# Altium PCB BatteryCounterRX.PcbDoc
Units mm, origin at the board's own origin, x right, y up, seen from the top; angles counter-clockwise.
Board outline 63 x 76.9 mm, 2 copper layers (Top Layer, Bottom Layer); 91 components, 65 nets, 289 pads, 53 vias.
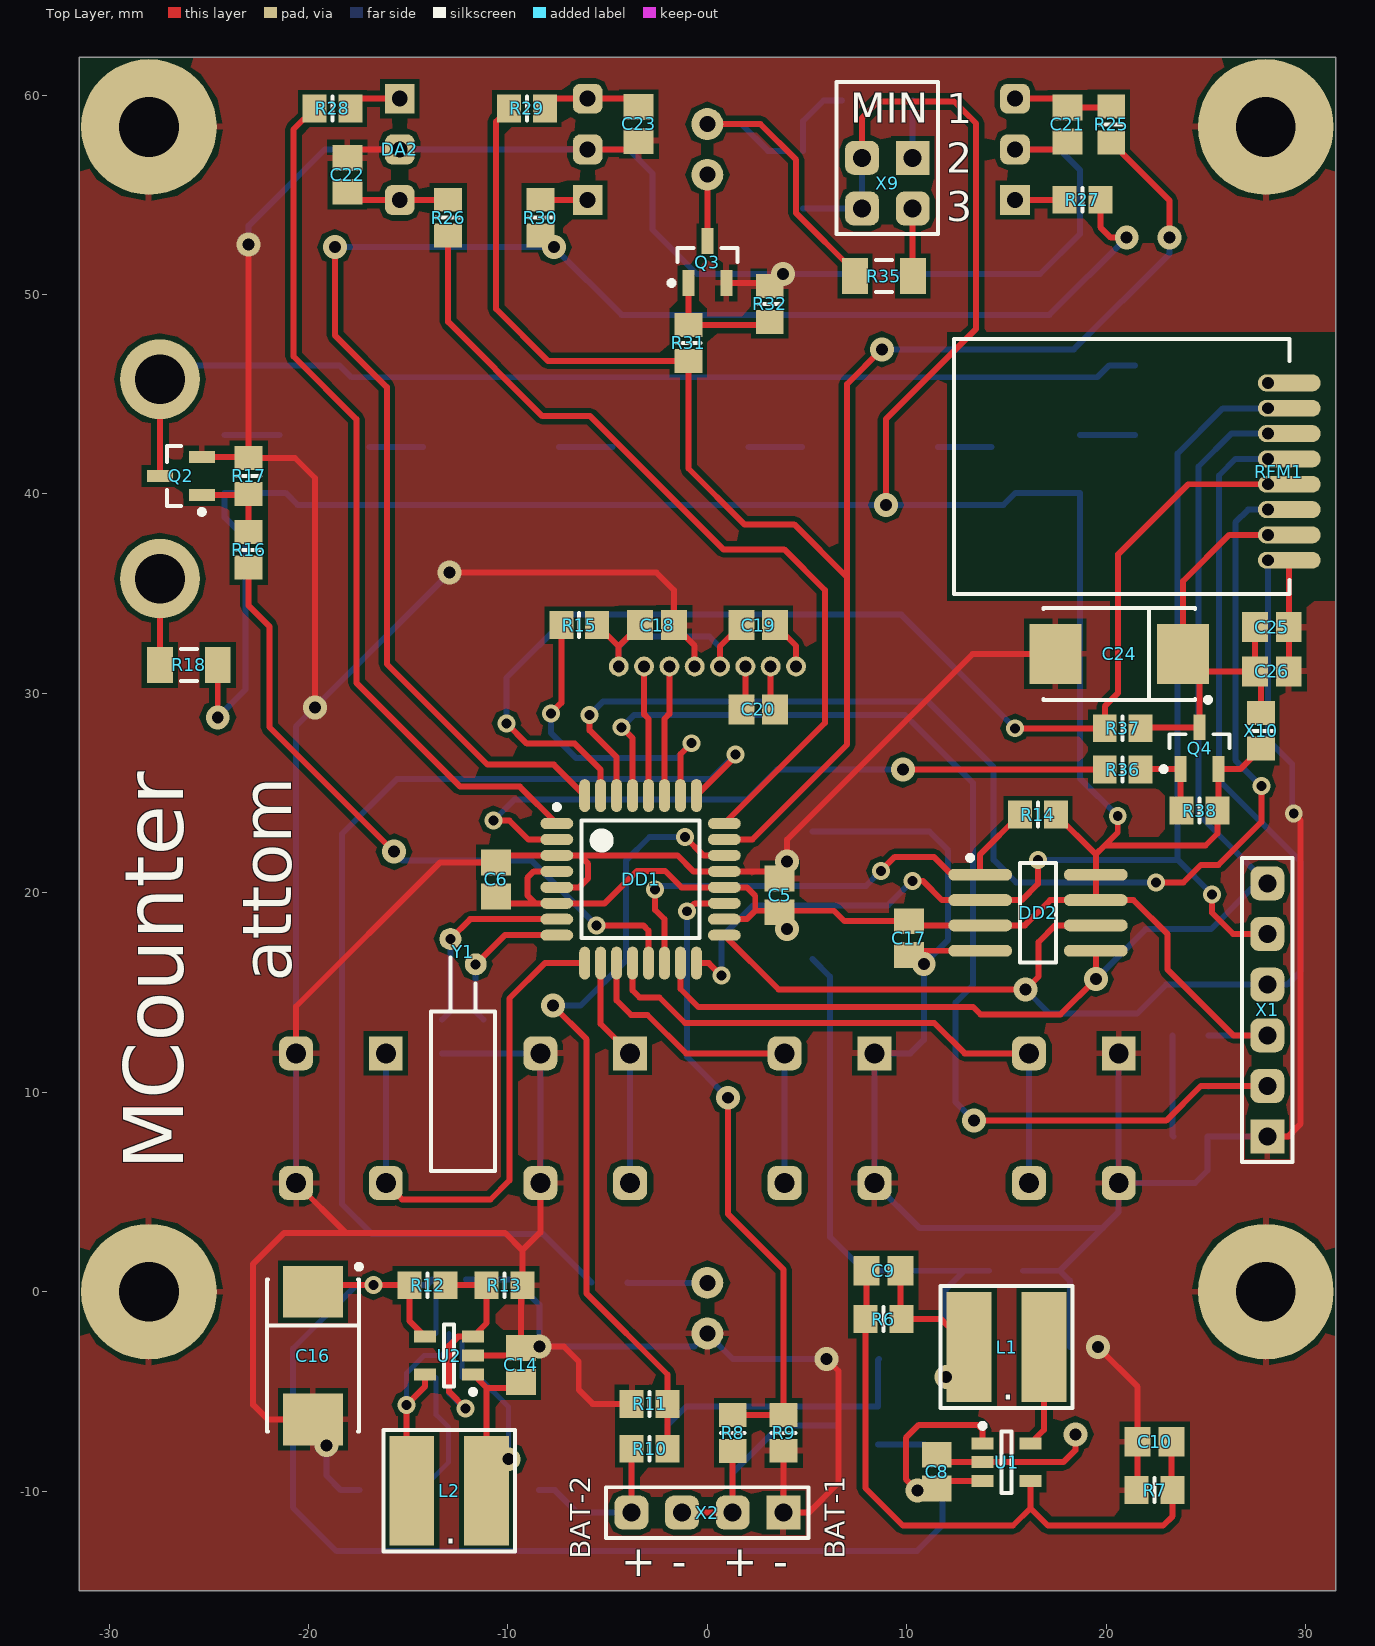
[diagram p0: Top Layer view]
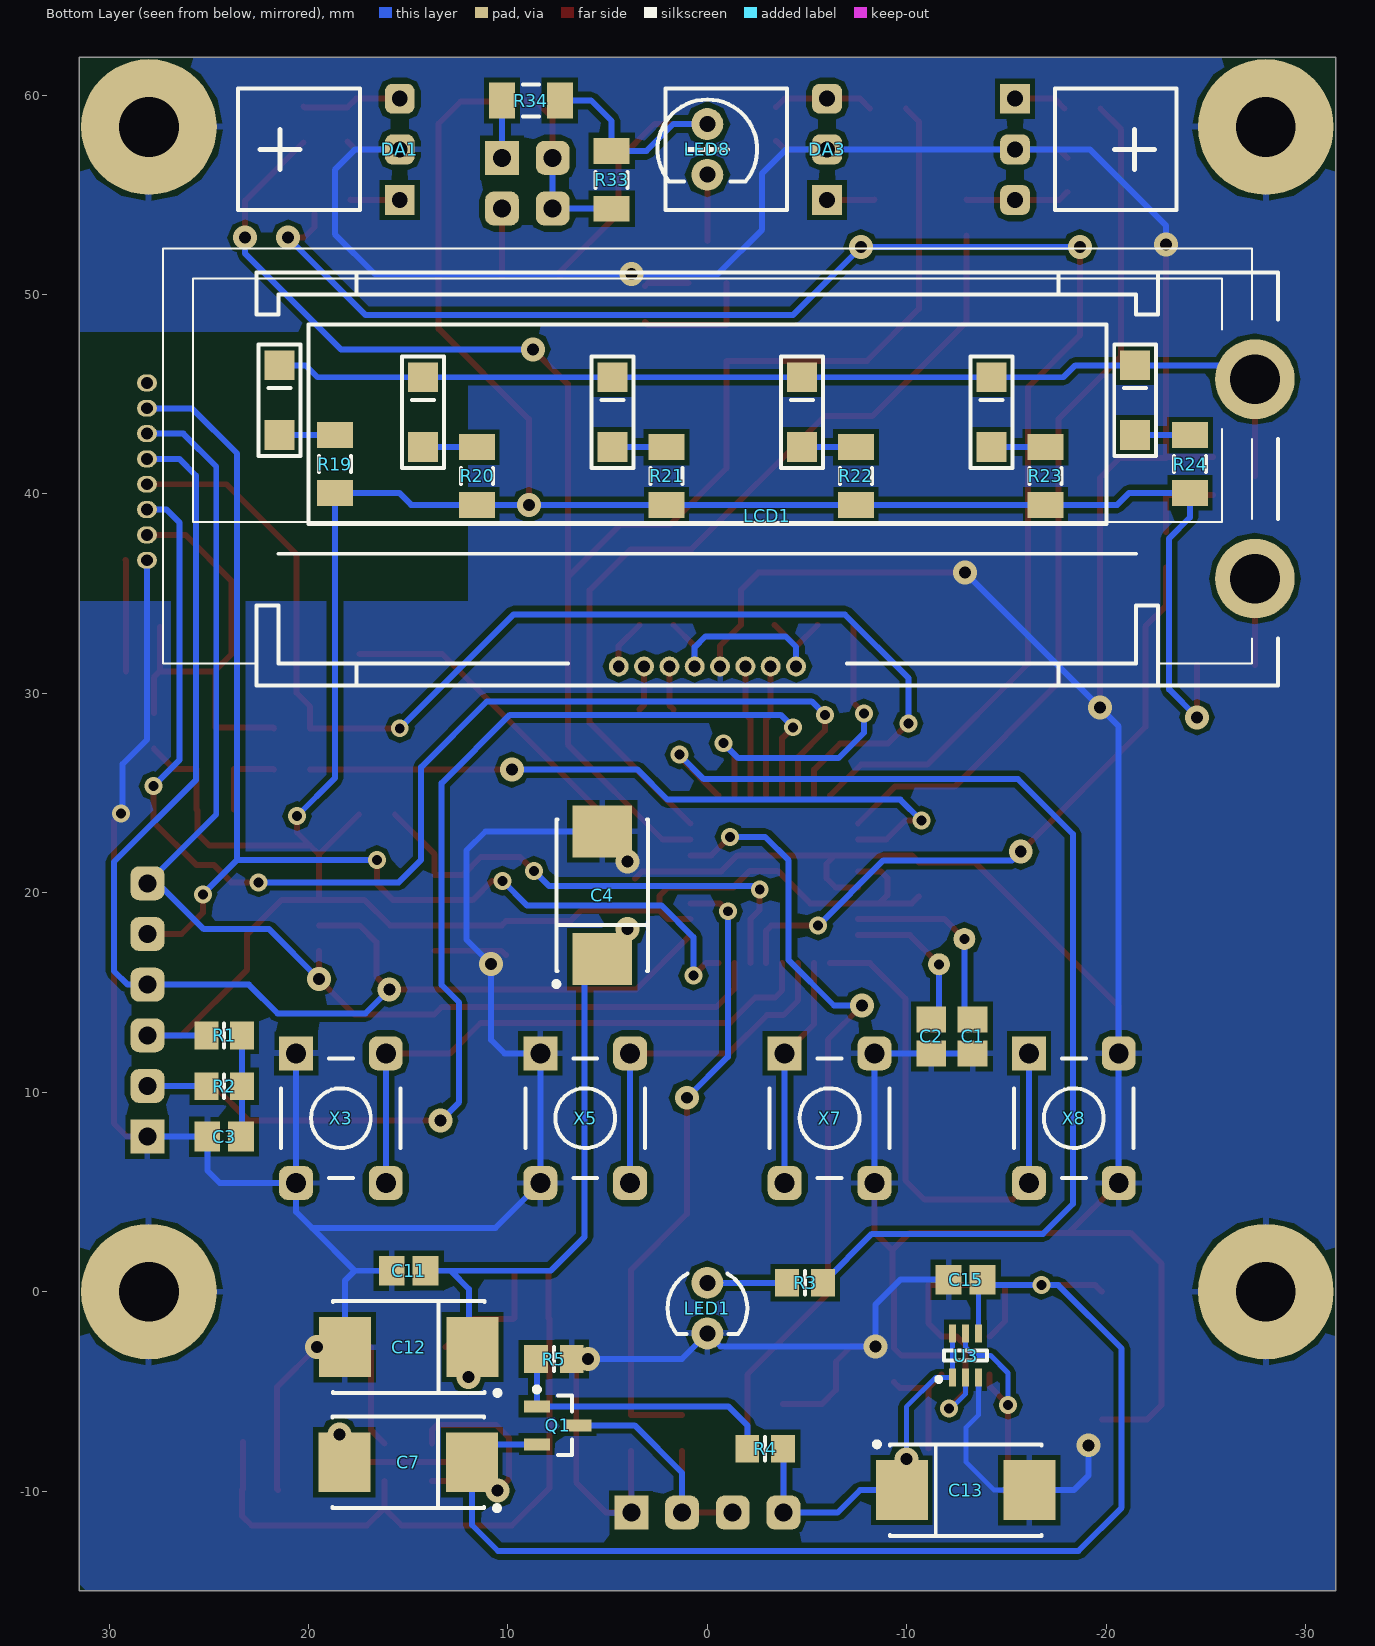
[diagram p1: Bottom Layer view, seen from below]

## Layer stack, top to bottom
Top Solder: solder mask 0.0102, Solder Resist, Dk 3.5
Top Layer: signal copper 0.0356
Dielectric 1: dielectric 0.32, FR-4, Dk 4.8
Bottom Layer: signal copper 0.0356
Bottom Solder: solder mask 0.0102, Solder Resist, Dk 3.5

## Board outline
-31.5,-15 -31.5,61.9 31.5,61.9 31.5,-15

## Design rules (kind name [scope] priority, off if disabled: settings)
Clearance [(OnLayer('Bottom Layer') OR OnLayer('Drill Drawing') OR OnLayer('Drill Guide') OR OnLayer('Multi-Layer') OR OnLayer('Top Layer')) vs (OnLayer('Bottom Layer') OR OnLayer('Drill Drawing') OR OnLayer('Drill Guide') OR OnLayer('Multi-Layer') OR OnLayer('Top Layer'))] p1: gap=0.25
ComponentClearance [All] p1: gap=0.25 collisioncheckmode=3 verticalgap=0.25 showdistances=FALSE
ComponentOrientations [All] p1: allowedrotations=27
DiffPairsRouting [All] p1: maxlimit=0.25 minlimit=0.25 mostfreqgap=0.25 toplayer_minwidth=0.381 toplayer_maxwidth=0.381 toplayer_prefwidth=0.381 bottomlayer_minwidth=0.381 bottomlayer_maxwidth=0.381 bottomlayer_prefwidth=0.381 maxuncoupledlength=12.5
Height [All] p1: minheight=0 maxheight=25 prefheight=12.5
HoleSize [All] p1: absolutevalues=TRUE maxlimit=3 minlimit=0.25 maxpercent=80.000 minpercent=20.000
HoleToHoleClearance [All] p1: gap=0.3 allowstackedmicrovias=TRUE
MinimumSolderMaskSliver [All] p1: minsoldermaskwidth=0.25
PlaneClearance [All] p1: clearance=0.5
PlaneConnect [All] p1: planeconnectstyle=Relief reliefexpansion=0.5 reliefentries=4 reliefconductorwidth=0.3 reliefairgap=0.3
PolygonConnect PolygonConnect_Via [All vs IsVia] p1: connectstyle=Direct reliefconductorwidth=0.254 reliefentries=4 polygonreliefangle="90 Angle" airgapwidth=0.254
PolygonConnect [All vs Not IsVia] p2: connectstyle=Relief reliefconductorwidth=0.3 reliefentries=4 polygonreliefangle="90 Angle" airgapwidth=0.254
RoutingCorners [All] p1: cornerstyle=45-Degree minsetback=2.5 maxsetback=3
RoutingVias [All] p1: holewidth=0.6 width=0.9 viastyle="Through Hole" minholewidth=0.5 minwidth=0.7 maxholewidth=0.75 maxwidth=1.25
SMDNeckDown [All] p1: percent=75.000
SMDToCorner [All] p1: distance=0
SMDToPlane [All] p1: distance=0
SilkToSilkClearance [All] p1: silktosilkclearance=0
SilkToSolderMaskClearance SilkscreenOverComponentPads [IsPad] p1: minsilkscreentomaskgap=0.01 clearancetoexposedcopper=TRUE
SolderMaskExpansion [All] p1: expansion=0
UnpouredPolygon [All] p1: allowunpoured=FALSE
Width [All] p1: maxlimit=1 minlimit=0.25 preferedwidth=0.3
18 further rules are at their usual default settings.

## Classes and differential pairs
component class RFTransceiver: C24 C25 C26 Q4 R36 R37 R38 RFM1 X10
component class PhotoSensors: C21 C22 C23 DA1 DA2 DA3 R25 R26 R27 R28 R29 R30
component class Micro: C1 C2 C3 C4 C5 C6 DD1 LED1 R1 R2 R3 X1 Y1
component class Memory: C17 DD2 R14
component class LCDDisplay: C18 C19 C20 LCD1 Q2 R15 R16 R17 R18 R19 R20 R21 R22 R23 R24
component class KeyBoard: X3 X5 X7 X8
component class IRGenerator: LED8 Q3 R31 R32 R33 R34 R35 X9
component class BattPower: C7 C8 C9 C10 C11 C12 C13 C14 C15 C16 L1 L2 Q1 R4 R5 R6 R7 R8 R9 R10 R11 R12 R13 U1 U2 U3 X2

## Components (designator, comment, footprint, x,y, rotation, side; value= is the part's Value field where it differs from the comment)
C1 "C6.8pF-50V-10%" C0805 -13.3,12.8 r90 bottom
C2 "C15pF-50V-10%" C0805 -11.225,12.8 r90 bottom
C3 "C1uF-50V" C0805 24.225,7.775 r180 bottom
C4 "C47uF-10V-tant" TC2917 5.275,19.875 r90 bottom
C5 "C0.1uF-50V" C0805 3.625,19.875 r270 top
C6 "C0.1uF-50V" C0805 -10.6,20.675 r270 top
C7 "C47uF-10V-tant" TC2917 15,-8.55 r0 bottom
C8 "C4.7uF-16V" C0805 11.5,-9.025 r270 top
C9 "C33pF-50V" C0805 8.825,1.05 r0 top
C10 "C150pF-50V" C0805 22.425,-7.525 r0 top
C11 "C10uF-16V" C0805 14.975,1.05 r180 bottom
C12 "C47uF-10V-tant" TC2917 14.975,-2.775 r0 bottom
C13 "C47uF-10V-tant" TC2917 -12.95,-9.95 r180 bottom
C14 "C10uF-16V" C0805 -9.35,-3.675 r270 top
C15 "C10uF-16V" C0805 -12.95,0.6 r180 bottom
C16 "C47uF-10V-tant" TC2917 -19.775,-3.2 r270 top
C17 "C0.1uF-50V" C0805 10.1,17.725 r90 top
C18 "C0.1uF-50V" C0805 -2.525,33.425 r180 top
C19 "C1uF-50V" C0805 2.55,33.425 r180 top
C20 "C1uF-50V" C0805 2.55,29.2 r180 top
C21 "C0.1uF-50V" C0805 18.05,58.525 r90 top
C22 "C0.1uF-50V" C0805 -18.05,56 r270 top
C23 "C0.1uF-50V" C0805 -3.45,58.55 r90 top
C24 "C47uF-10V-tant" TC2917 20.65,31.975 r180 top
C25 "C0.1uF-50V" C0805 28.3,33.325 r0 top
C26 "C1uF-50V" C0805 28.3,31.1 r0 top
DA1 "SFH5110-36" SFH5110#1 21.425,57.275 r180 bottom
DA2 "SFH5110-36" SFH5110#2 -21.425,57.275 r0 top
DA3 "SFH5110-36" SFH5110#1 0,57.275 r180 bottom
DD1 "ATmega328P" 32A_N -3.35,20.675 r0 top
DD2 "AT25256B" 8S12_UNIV 16.575,19 r0 top
L1 "CD54" CD54-CDRH4D 15,-2.775 r180 top
L2 "CD54" CD54-CDRH4D -12.95,-9.975 r180 top
LCD1 "WO1602" WO1602I 0,37 r180 bottom
LED1 "LED-RED" LED-3 0,-0.825 r180 bottom
LED8 "L53F3C" LED-5-SHORT-LEGS 0,57.275 r180 bottom
Q1 "IRLML6401" SOT23_N 7.5,-6.7 r180 bottom
Q2 "IRLML6244" SOT23_N -26.4,40.9 r180 top
Q3 "IRLML6244" SOT23_N 0,51.625 r90 top
Q4 "IRLML6401" SOT23_N 24.675,27.25 r90 top
R1 "R10k-5%" R0805 24.225,12.85 r0 bottom
R2 "R10k-5%" R0805 24.225,10.3 r0 bottom
R3 "R1k-5%" R0805 -4.9,0.45 r180 bottom
R4 "R100-5%" R0805 -2.9,-7.875 r180 bottom
R5 "R3.3M-5%" R0805 7.7,-3.375 r0 bottom
R6 "R442k-1%" R0805 8.825,-1.375 r0 top
R7 "R100k-1%" R0805 22.425,-9.95 r0 top
R8 "R3.3M-5%" R0805 1.27,-7.08 r270 top
R9 "R3.3M-5%" R0805 3.825,-7.075 r90 top
R10 "R3.3M-5%" R0805 -2.9,-7.875 r180 top
R11 "R3.3M-5%" R0805 -2.9,-5.625 r0 top
R12 "R560k-1%" R0805 -14.025,0.325 r180 top
R13 "R330k-1%" R0805 -10.175,0.325 r180 top
R14 "R3.3M-5%" R0805 16.575,23.925 r180 top
R15 "R100-5%" R0805 -6.425,33.425 r180 top
R16 "R100-5%" R0805 -23,37.2 r90 top
R17 "R3.3M-5%" R0805 -23,40.9 r90 top
R18 "R330-5%" R1206 -26,31.425 r0 top
R19 "R680-5%" R1206 18.675,41.5 r270 bottom
R20 "R680-5%" R1206 11.55,40.9 r270 bottom
R21 "R680-5%" R1206 2.05,40.9 r270 bottom
R22 "R680-5%" R1206 -7.45,40.9 r270 bottom
R23 "R680-5%" R1206 -16.95,40.9 r90 bottom
R24 "R680-5%" R1206 -24.2,41.5 r270 bottom
R25 "R100-5%" R0805 20.25,58.525 r270 top
R26 "R100-5%" R0805 -13,53.85 r270 top
R27 "R100-5%" R0805 18.8,54.75 r180 top
R28 "R100-5%" R0805 -18.8,59.325 r0 top
R29 "R100-5%" R0805 -9.05,59.325 r180 top
R30 "R100-5%" R0805 -8.375,53.85 r90 top
R31 "R100-5%" R0805 -0.95,47.575 r90 top
R32 "R3.3M-5%" R0805 3.125,49.525 r90 top
R33 "R100-5%" R1206 4.8,55.75 r270 bottom
R34 "R100-5%" R1206 8.85,59.725 r180 bottom
R35 "R51-5%" R1206 8.85,50.925 r180 top
R36 "R100-5%" R0805 20.825,26.175 r0 top
R37 "R3.3M-5%" R0805 20.825,28.25 r180 top
R38 "R3.3M-5%" R0805 24.675,24.125 r0 top
RFM1 "RFM73" RFM73-SML 28.1,36.675 r90 top
U1 "TPS62200DBVT" 5ST1_N 15,-8.55 r0 top
U2 "MAX1722EZK+T+" 5ST1_N -12.95,-3.2 r180 top
U3 "TPS61220DCKT" SC70-6-N -12.95,-3.2 r90 bottom
X1 "PLS-6" PLS-6 28.075,7.775 r90 top
X2 "PLS-4" PLS-4 3.81,-11.075 r180 top
X3 "TACT0606" TACT0606 18.375,8.7 r180 bottom
X5 "TACT0606" TACT0606 6.125,8.7 r180 bottom
X7 "TACT0606" TACT0606 -6.125,8.7 r180 bottom
X8 "TACT0606" TACT0606 -18.375,8.7 r180 bottom
X9 "JUMPER-PLD-POWER-0-1-2" PLD-POWER-1-2-3 9.025,56.85 r270 top
X10 "JUMPER0" R0805 27.75,28.125 r90 top
Y1 "XTAL32768Hz" KX38 -12.25,17.05 r270 top

## Footprints (in the part's own frame and the unit in brackets; to place one, negate y for a bottom-side part, rotate by r counter-clockwise, add the part's x,y. Pads: shape width x height; smd on the part's side, far side on the other; paste and mask are expansions set on the pad)
5ST1_N [mm] "SOT23-5, 6-Leads, Body 2.9x1.6mm, Pitch 0.95mm, Lead Span 2.7mm, IPC Medium Density"
  rect 1.1x0.6 smd: 1(-1.2,0.95) 2(-1.2,0) 3(-1.2,-0.95) 4(1.2,-0.95) 5(1.2,0.95)
  silkscreen extent -1.32,-1.55 0.25,1.95, body extent -0.9,-1.55 0.9,1.55, height 1.45
8S12_UNIV [mm] "8-Pin Small Outline Package 1.27 mm Pitch, IPC Medium Density"
  oval 3.2x0.6 smd: 1(-2.9,1.905) 2(-2.9,0.635) 3(-2.9,-0.635) 4(-2.9,-1.905) 5(2.9,-1.905) 6(2.9,-0.635) 7(2.9,0.635) 8(2.9,1.905)
  silkscreen extent -3.52,-2.5 0.9,2.88, body extent -3.18,-2.5 3.02,3, height 1.73
32A_N [mm] "Thin QFP, 32-Leads, Body 7x7mm, Pitch 0.8mm, IPC Medium Density"
  oval 1.65x0.55 smd: 1(-4.2,2.8) 2(-4.2,2) 3(-4.2,1.2) 4(-4.2,0.4) 5(-4.2,-0.4) 6(-4.2,-1.2) 7(-4.2,-2) 8(-4.2,-2.8) 17(4.2,-2.8) 18(4.2,-2) 19(4.2,-1.2) 20(4.2,-0.4) 21(4.2,0.4) 22(4.2,1.2) 23(4.2,2) 24(4.2,2.8)
  oval 0.55x1.65 smd: 9(-2.8,-4.2) 10(-2,-4.2) 11(-1.2,-4.2) 12(-0.4,-4.2) 13(0.4,-4.2) 14(1.2,-4.2) 15(2,-4.2) 16(2.8,-4.2) 25(2.8,4.2) 26(2,4.2) 27(1.2,4.2) 28(0.4,4.2) 29(-0.4,4.2) 30(-1.2,4.2) 31(-2,4.2) 32(-2.8,4.2)
  silkscreen extent -4.32,-2.95 2.95,3.75, body extent -4.38,-4.37 4.37,4.38, height 1.2
C0805 [mm] "Chip Capacitor, Body 2.0x1.3mm, IPC Medium Density"
  rect 1.3x1.5 smd: 1(-0.85,0) 2(0.85,0)
  body extent -1.1,-0.72 1.1,0.72, height 1.1
CD54-CDRH4D [mm] "Magnetically inductor - multipurpose footprint (CD54, CDRH4D)"
  rect 2.25x5.5 smd: 1(-1.875,0) 2(1.875,0)
  silkscreen extent -3.3,-3.05 3.3,3.05, body extent -3,-2.59 3,2.6, height 4.8
KX38 [mm] "Crystal, Thru-Hole; 2 Leads; Body 3.0 x 8.0 mm (Dia.xH)"
  round 1.1 hole 0.5: 1(0.635,0.635) 2(-0.635,-0.635)
  silkscreen extent 0.3,-1.6 11,1.6, body extent 3,-1.49 11,1.5, height 2.99
LED-3 [mm] "Typical LED - 3mm; 2 Leads"
  round 1.6 hole 0.8: 1(0,1.27) 2(0,-1.27)
  silkscreen extent -2,-1.29 2,1.73, body extent -1.56,-1.48 1.43,1.52, height 11
LED-5-SHORT-LEGS [mm] "Typical LED - 5mm; 2 short leads;"
  round 1.6 hole 0.8: 1(0,1.27) 2(0,-1.27)
  silkscreen extent -2.5,-1.61 2.5,2.5, body extent -2.55,-2.48 2.43,2.52, height 8.6
PLD-POWER-1-2-3 [mm] "PLD power switch 1-2-3"
  rect 1.7x1.7 hole 0.9: 1(0,1.27)
  rrect50% 1.7x1.7 hole 0.9: 2(0,-1.27) 3(2.54,1.27) 4(2.54,-1.27)
  silkscreen extent -3.81,-2.54 3.81,2.54, body extent -1.27,-2.57 3.81,2.54, height 8.54
PLS-4 [mm] "PLS-4; Pitch 2.54"
  rect 1.7x1.7 hole 0.9: 1(0,0)
  rrect50% 1.7x1.7 hole 0.9: 2(2.54,0) 3(5.08,0) 4(7.62,0)
  silkscreen extent -1.27,-1.27 8.89,1.27, body extent -1.27,-1.27 8.89,1.27, height 8.54
PLS-6 [mm] "PLS-6; Pitch 2.54"
  rect 1.7x1.7 hole 0.9: 1(0,0)
  rrect50% 1.7x1.7 hole 0.9: 2(2.54,0) 3(5.08,0) 4(7.62,0) 5(10.16,0) 6(12.7,0)
  silkscreen extent -1.27,-1.27 13.97,1.27, body extent -1.27,-1.27 13.97,1.27, height 8.54
R0805 [mm] "Chip Resistor, Body 2.0x1.3mm, IPC Medium Density"
  rect 1.2x1.4 smd: 1(-0.9,0) 2(0.9,0)
  silkscreen extent 0,-0.6 0,0.6, body extent -1.07,-0.7 1.07,0.7, height 0.65
R1206 [mm] "Chip Resistor, Body 3.2x1.6mm, IPC Medium Density"
  rect 1.3x1.8 smd: 1(-1.45,0) 2(1.45,0)
  silkscreen extent -0.4,-0.8 0.4,0.8, body extent -1.68,-0.87 1.68,0.87, height 0.71
RFM73-SML [mm] "2.4GHz GFSK Transceiver"
  oval 0.85x1 hole 0.6: 1(0,0) 2(1.27,0) 3(2.54,0) 4(3.81,0) 5(5.08,0) 6(6.35,0) 7(7.62,0) 8(8.89,0)
  oval 0.85x3.15 smd: 1(0,-1.075) 2(1.27,-1.075) 3(2.54,-1.075) 4(3.81,-1.075) 5(5.08,-1.075) 6(6.35,-1.075) 7(7.62,-1.075) 8(8.89,-1.075)
  silkscreen extent -1.7,-1.07 11.1,15.73, body extent -1.7,-1.07 11.1,15.73, height 3
SC70-6-N [mm] "SC70-6, 6-Leads, Body 2.15x1.40mm, Pitch 0.65mm, Lead Span 2.4mm, IPC Medium Density"
  rect 0.9x0.35 smd: 1(-1.1,0.65) 2(-1.1,0) 3(-1.1,-0.65) 4(1.1,-0.65) 5(1.1,0) 6(1.1,0.65)
  silkscreen extent -1.3,-1.07 0.25,1.45, body extent -0.7,-1.07 0.7,1.07, height 1.45
SFH5110#1 [mm] "IR-Receiver"
  rect 1.5x1.5 hole 0.8: 1(6,-2.54)
  rrect50% 1.5x1.5 hole 0.8: 2(6,0) 3(6,2.54)
  silkscreen extent -2.1,-3.05 4,3.05, body extent -2.1,-3.05 6,3.05, height 5.1
SFH5110#2 [mm] "IR-Receiver"
  rect 1.5x1.5 hole 0.8: 1(6,2.54)
  rrect50% 1.5x1.5 hole 0.8: 2(6,0) 3(6,-2.54)
  body extent -2.1,-3.05 6,3.05, height 5.1
SOT23_N [mm] "SOT23, 3-Leads, Body 2.9x1.3mm, Pitch 0.95mm, Lead Span 2.3mm, IPC Medium Density"
  rect 1.3x0.6 smd: 1(-1.05,0.95) 2(-1.05,-0.95) 3(1.05,0)
  silkscreen extent -1.18,-1.5 0.7,1.92, body extent -0.7,-1.5 0.7,1.5, height 1.1
TACT0606 [mm] "TACT switch 6x6mm"
  rect 1.7x1.7 hole 1: 1(-2.25,3.25)
  rrect50% 1.7x1.7 hole 1: 2(-2.25,-3.25) 3(2.25,-3.25) 4(2.25,3.25)
  silkscreen extent -3,-3 3,3, body extent -3,-3 3,3, height 9
TC2917 [mm] "Capacitor, SM Tantalum; Body 7.3 x 4.3 mm (LxW typ)"
  rect 2.6x3 smd: 1(-3.2,0) 2(3.2,0)
  silkscreen extent -4.57,-2.3 3.8,2.43, body extent -3.65,-2.15 3.65,2.15, height 3.7
WO1602I [mm] "LCD COG display 16x02 VA(I)=40x10mm with backlight (ext VA(H)=51.5x12.2mm)"
  round 1 hole 0.6: 1(-4.445,-5.65) 2(-3.175,-5.65) 3(-1.905,-5.65) 4(-0.635,-5.65) 5(0.635,-5.65) 6(1.905,-5.65) 7(3.175,-5.65) 8(4.445,-5.65)
  round 4 hole 2.5: A(27.45,-1.25) K(27.45,8.75)
  rect 1.5x1.5 smd: A1(-21.45,5.95) A2(-14.25,5.35) A3(-4.75,5.35) A4(4.75,5.35) A5(14.25,5.35) A6(21.45,5.95) K1(-21.45,9.45) K2(-14.25,8.85) K3(-4.75,8.85) K4(4.75,8.85) K5(14.25,8.85) K6(21.45,9.45)
  silkscreen extent -27.3,-6.6 28.6,15.3, body extent -22.6,-6.6 28.62,14.1, height 6.3

## Part data
DA1 DA2 DA3: "IR-Receiver"
DD1: "8-Bit AVR Microcontroller with 32K Bytes of In-System Programmable Flash Memory"
DD2: "SPI Serial EEPROM 256K Memory"
L1 L2: library part CD54NP-100M, "Inductor with Winding Polarity Marking"
LCD1: "LCD COG display 16x02"
LED1: "LED red"
LED8: "IR LED"
Q1 Q4: "P-Channel Power MOSFET"
Q2 Q3: "N-Channel Power MOSFET"
R1 R2: "R-10k-5%"
R3: "R-1k-5%"
R4 R15 R16 R25 R26 R27 R28 R29 R30 R31 R33 R34 R36: "R-100-5%"
R18: "R-330-5%"
R19 R20 R21 R22 R23 R24: "R-680-5%"
R35: "R-51-5%"
RFM1: "2.4GHz GFSK Transceiver"
U1 U2: "High efficiency step-down DC-DC convertor, 5-pin SOT23"
U3: "Low input voltage step-up DC-DC convertor, 6-pin SC70"
X3 X5 X7 X8: "Tact switch 6x6mm"
Y1: "Crystal Oscillator 32768Hz"

## Free pads (board coordinates)
  round 6.8 hole 3: M3(-28,0) M3(-28,58.4) M3(28,0) M3(28,58.4)

## Via types
v1: diameter 1.2, hole 0.6, Top Layer to Bottom Layer, 29 vias
v2: diameter 0.9, hole 0.5, Top Layer to Bottom Layer, 24 vias

## Nets (pads, with @x,y where several pads share a name; then routed paths per layer and width w, separated by ;. In a path a pad name is that pad's centre, name@x,y a point inside that pad or via, vN(x,y) a via of type N, cw(c..) or ccw(c..) an arc to the next point about the centre after c; other vN are vias at no path point)
BAT1: Q1.3 R8.2 X2.2 X2.3 | length 13.8
  Top Layer w0.3: X2.3 X2.2 R8.2
  Bottom Layer w0.3: X2.2 1.27,-9.08 3.65,-6.7 Q1.3
BAT2: C13.1 C14.2 L2.1 R4.2 R10.2 U2.1 U3.1 U3.6 X2.4 | length 24.7
  Top Layer w0.3: U2.1 -11.075,-4.825 ; L2.1@-11.075,-7.875 -11.075,-4.825 ; C14.2 -9.65,-4.825 -11.075,-4.825 ; X2.4 -3.81,-7.885 R10.2
  Bottom Layer w0.25: U3.6@-12.3,-2.55 U3.1 -11.45,-4.3 -9.975,-5.775 v1(-9.975,-8.4)
  Bottom Layer w0.3: -8.45,-9.95 -7.65,-9.95 -6.525,-11.075 X2.4 -3.81,-7.885 R4.2
NetC1_2: C1.2 DD1.7 Y1.2 | length 10
  Top Layer w0.3: Y1.2 -11.895,18.675 DD1.7
  Bottom Layer w0.3: C1.2 -12.885,14.065 Y1.2
NetC2_2: C2.2 DD1.8 Y1.1 | length 7.6
  Top Layer w0.3: Y1.1 -10.155,17.875 DD1.8
  Bottom Layer w0.3: Y1.1 -11.615,14.04 C2.2
NetC3_2: C3.2 R1.1 R2.1 | length 5.1
  Bottom Layer w0.3: R1.1 R2.1 23.325,7.825 C3.2
NetC7_2: C7.2 C8.1 U1.2 | length 8.2
  Top Layer w0.3: C8.1 11.875,-8.55 U1.2 17.85,-8.55 18.45,-7.95 v1(18.45,-7.15)
NetC9_1: C9.1 C10.2 R6.1 R7.2 U1.4 | length 33.1
  Top Layer w0.3: C9.1 7.975,-1.325 R6.1 7.925,-9.85 9.8,-11.725 15.325,-11.725 16.2,-10.85 ; U1.4 16.2,-10.85 ; C10.2 23.275,-9.9 R7.2 23.325,-11.25 22.85,-11.725 17.075,-11.725 16.2,-10.85
NetC18_2: C18.2 C19.2 LCD1.4 LCD1.8 R15.1 | length 14
  Top Layer w0.3: R15.1 -4.455,32.355 -4.445,32.355 ; LCD1.8 -4.445,32.355 ; C18.2 -4.445,32.355 ; LCD1.4 0.635,32.36 C19.2
  Bottom Layer w0.3: LCD1.8 -4.445,32.33 -3.925,32.85 0.1,32.85 0.635,32.315 LCD1.4
NetC19_1: C19.1 LCD1.1 | length 2.5
  Top Layer w0.3: C19.1 4.445,32.38 LCD1.1
NetC20_1: C20.1 LCD1.2 | length 2.2
  Top Layer w0.3: LCD1.2 3.175,29.425 C20.1
NetC20_2: C20.2 LCD1.3 | length 2.2
  Top Layer w0.3: C20.2 1.905,29.405 LCD1.3
NetC21_2: C21.2 DA1.3 R25.1 | length 5
  Top Layer w0.3: DA1.3 17.61,59.815 C21.2 20.2,59.375 R25.1
NetC22_2: C22.2 DA2.3 R26.1 | length 5.2
  Top Layer w0.3: C22.2 -17.635,54.735 DA2.3 -13.015,54.735 R26.1
NetC23_2: C23.2 DA3.3 R29.1 | length 5.1
  Top Layer w0.3: R29.1 -7.66,59.815 DA3.3 -3.865,59.815 C23.2
NetC24_1: C24.1 C25.1 C26.1 Q4.3 R37.1 RFM1.2 X10.2 | length 23.1
  Top Layer w0.3: R37.1 21.775,28.3 Q4.3 C24.1@24.675,31.15 ; C25.1 C26.1 ; X10.2 27.75,30.8 C26.1 ; RFM1.2@28.1,37.945 26.17,37.945 23.85,35.625 C24.1 C24.1@24.675,31.15 ; C24.1@24.675,31.15 24.725,31.1 C26.1
NetDA1_1: DA1.1 R27.2 | length 2.5
  Top Layer w0.3: DA1.1 17.885,54.735 R27.2
NetDA2_1: DA2.1 R28.2 | length 2.7
  Top Layer w0.3: R28.2 -17.41,59.815 DA2.1
NetDA3_1: DA3.1 R30.2 | length 2.4
  Top Layer w0.3: R30.2 -8.36,54.735 DA3.1
NetDD1_1: DD1.1 R28.1 | length 43.5
  Top Layer w0.3: R28.1 -20.75,58.275 -20.75,46.9 -17.6,43.75 -17.6,30.525 -12.4,25.325 -9.4,25.325 DD1.1
NetDD1_2: DD1.2 R36.1 | length 35.3
  Top Layer w0.3: v2(-10.725,23.625) -9.925,23.625 -8.975,22.675 DD1.2 ; v1(9.8,26.175) R36.1
  Bottom Layer w0.3: v2(-10.725,23.625) -9.675,24.675 2,24.675 3.5,26.175 v1(9.8,26.175)
NetDD1_9: DD1.9 X8.1 X8.2 | length 27.1
  Top Layer w0.3: X8.2 -15.3,4.625 -10.875,4.625 -9.925,5.575 -9.925,14.7 -8.15,16.475 DD1.9
  Bottom Layer w0.3: X8.2 X8.1
NetDD1_10: DD1.10 X7.1 X7.2 | length 11.6
  Top Layer w0.3: DD1.10 -5.35,13.425 X7.1
  Bottom Layer w0.3: X7.2 X7.1
NetDD1_11: DD1.11 X5.3 X5.4 | length 17.9
  Top Layer w0.3: DD1.11 -4.55,14.6 -3.825,13.875 -3,13.875 -1.075,11.95 X5.4
  Bottom Layer w0.3: X5.3 X5.4
NetDD1_12: DD1.12 X3.3 X3.4 | length 29.1
  Top Layer w0.3: DD1.12 -3.75,15.1 -3.4,14.75 -2.4,14.75 -1.125,13.475 11.375,13.475 12.9,11.95 X3.4
  Bottom Layer w0.3: X3.3 X3.4
NetDD1_13: DD1.13 R16.1 | length 33.3
  Top Layer w0.3: R16.1 -23,34.4 -21.963,33.363 -21.963,28.313 v1(-15.713,22.063) ; v2(-5.55,18.35) -3.2,18.35 -2.95,18.1 DD1.13
  Bottom Layer w0.3: v1(-15.713,22.063) -15.275,21.625 -8.825,21.625 v2(-5.55,18.35)
NetDD1_14: DD1.14 DD2.1 R14.2 | length 25.1
  Top Layer w0.3: v2(-2.625,20.175) -2.625,19.15 -2.15,18.675 DD1.14 ; v2(8.7,21.1) 9.4,21.8 11.35,21.8 12.245,20.905 DD2.1 13.675,21.925 R14.2
  Bottom Layer w0.3: v2(-2.625,20.175) -2.45,20.35 7.95,20.35 v2(8.7,21.1)
NetDD1_15: DD1.15 DD2.5 RFM1.6 X1.6 | length 61.9
  Top Layer w0.3: DD1.15 -1.35,15.175 -0.45,14.275 13.325,14.275 13.7,13.9 17.7,13.9 v1(19.475,15.675) DD2.5
  Bottom Layer w0.3: v1(19.475,15.675) 21.975,18.175 25.25,18.175 27.55,20.475 X1.6 24.625,23.925 24.625,41.375 26.275,43.025 RFM1.6@28.1,43.025
NetDD1_16: DD1.16 DD2.2 RFM1.7 X1.5 | length 61.8
  Top Layer w0.3: DD1.16 0.075,16.475 v2(0.7,15.85) ; v2(10.275,20.6) 10.8,20.6 11.765,19.635 DD2.2 15.76,19.635 16.575,20.45 v2(16.575,21.65) ; v2(25.3,19.925) 25.3,19 26.365,17.935 X1.5
  Bottom Layer w0.3: v2(0.7,15.85) 0.7,17.775 2.3,19.375 9.05,19.375 v2(10.275,20.6) ; v2(16.575,21.65) 23.575,21.65 ; v2(25.3,19.925) 23.575,21.65 ; RFM1.7@28.1,44.295 25.845,44.295 23.575,42.025 23.575,21.65
NetDD1_17: DD1.17 DD2.6 RFM1.5 X1.4 | length 66.6
  Top Layer w0.3: DD1.17 3.575,15.15 v1(15.95,15.15) 16.6,15.8 16.6,17.525 17.44,18.365 DD2.6
  Bottom Layer w0.3: v1(15.95,15.15) 17.15,13.95 21.55,13.95 22.995,15.395 X1.4 29.07,15.395 29.75,16.075 29.75,21.55 25.65,25.65 25.65,40.925 26.48,41.755 RFM1.5@28.1,41.755
NetDD1_19: DD1.19 R8.1 R9.2 | length 31.9
  Top Layer w0.3: v2(-1.025,19.075) -0.625,19.475 DD1.19 ; v1(1.025,9.725) 1.025,3.9 3.825,1.1 R9.2 3.82,-6.18 R8.1
  Bottom Layer w0.3: v2(-1.025,19.075) -1.025,11.775 v1(1.025,9.725)
NetDD1_22: DD1.22 R10.1 R11.2 | length 40
  Top Layer w0.3: v1(-7.75,14.35) -6.05,12.65 -6.05,-0.1 -2,-4.15 R11.2 R10.1 ; v2(-1.125,22.8) -0.2,21.875 DD1.22
  Bottom Layer w0.3: v1(-7.75,14.35) -6.35,14.35 -4.075,16.625 -4.075,21.625 -2.9,22.8 v2(-1.125,22.8)
NetDD1_23: DD1.23 R25.2 R29.2 R31.1 | length 88.5
  Top Layer w0.3: R29.2 -10.6,58.675 -10.6,49.275 -8,46.675 R31.1 -0.95,41.275 1.85,38.475 4.35,38.475 7,35.825 ; DD1.23 2.25,22.675 7,27.425 7,35.825 ; v1(8.75,47.25) 7,45.5 7,35.825 ; R25.2 23.175,54.7 v1(23.175,52.85)
  Bottom Layer w0.3: v1(8.75,47.25) 18.375,47.25 23.175,52.05 v1(23.175,52.85)
NetDD1_24: DD1.24 R26.2 | length 42.6
  Top Layer w0.3: R26.2 -13,48.625 -8.275,43.9 -5.875,43.9 0.8,37.225 3.85,37.225 5.9,35.175 5.9,28.525 DD1.24
NetDD1_25: DD1.25 R3.2 | length 56.9
  Top Layer w0.3: DD1.25 1.4,26.825 v2(1.4,26.925)
  Bottom Layer w0.3: R3.2 -8.25,2.9 -16.825,2.9 -18.325,4.4 -18.325,22.95 -15.575,25.7 0.175,25.7 v2(1.4,26.925)
NetDD1_26: DD1.26 R15.2 | length 16.4
  Top Layer w0.3: v2(-7.85,29) -7.325,29.525 R15.2 ; DD1.26 -1.35,26.95 v2(-0.8,27.5)
  Bottom Layer w0.3: v2(-7.85,29) -7.85,28.025 -6.575,26.75 -1.55,26.75 v2(-0.8,27.5)
NetDD1_27: DD1.27 LCD1.6 | length 6.6
  Top Layer w0.3: DD1.27 -2.15,28.725 -1.905,28.97 LCD1.6
NetDD1_28: DD1.28 LCD1.7 | length 6.6
  Top Layer w0.3: LCD1.7 -3.175,28.95 -2.95,28.725 DD1.28
NetDD1_29: DD1.29 R2.2 X1.2 | length 59
  Top Layer w0.3: v2(-4.3,28.3) -3.75,27.75 DD1.29 ; v1(13.375,8.575) 23,8.575 24.74,10.315 X1.2
  Bottom Layer w0.3: v2(-4.3,28.3) -3.675,28.925 9.9,28.925 13.325,25.5 13.325,15.375 12.45,14.5 12.45,9.5 v1(13.375,8.575) ; R2.2 25.14,10.315 X1.2
NetDD1_30: DD1.30 RFM1.3 | length 63.8
  Top Layer w0.3: v2(-5.9,28.925) -5.9,28.15 -4.55,26.8 DD1.30 ; v2(22.5,20.525) 23.875,20.525 24.75,21.4 25.625,21.4 27.775,23.55 v2(27.775,25.35)
  Bottom Layer w0.3: v2(-5.9,28.925) -5.225,29.6 11.05,29.6 14.35,26.3 14.35,21.65 15.475,20.525 v2(22.5,20.525) ; v2(27.775,25.35) 26.475,26.65 26.475,38.575 27.115,39.215 RFM1.3@28.1,39.215
NetDD1_31: DD1.31 R37.2 RFM1.4 | length 60.9
  Top Layer w0.3: v2(-10.075,28.5) -9.05,27.475 -6.65,27.475 -5.35,26.175 DD1.31 ; v2(15.425,28.25) R37.2 19.925,29.35 20.6,30.025 20.6,36.975 24.11,40.485 RFM1.4@28.1,40.485
  Bottom Layer w0.3: v2(-10.075,28.5) -10.075,30.775 -6.9,33.95 9.725,33.95 v2(15.425,28.25)
NetDD1_32: DD1.32 R27.1 R30.1 | length 79.6
  Top Layer w0.3: v1(-18.675,52.375) -18.675,47.95 -16.075,45.35 -16.075,31.475 -11.025,26.425 -7.7,26.425 DD1.32 ; R27.1@19.7,54.05 19.7,53.375 20.225,52.85 v1(21.025,52.85)
  Bottom Layer w0.3: v1(-18.675,52.375) v1(-7.7,52.375) -4.3,48.975 17.15,48.975 v1(21.025,52.85)
NetL1_1: L1.1 U1.5 | length 5.1
  Top Layer w0.3: U1.5 16.875,-6.925 L1.1
NetL2_2: L2.2 U2.5 U3.5 | length 11.3
  Top Layer w0.3: L2.2 -15.075,-9.725 v2(-15.075,-5.675) -14.15,-4.75 U2.5
  Bottom Layer w0.25: v2(-15.075,-5.675) -15.075,-4.075 -14.2,-3.2 -13.35,-3.2 -12.95,-2.8 U3.5
NetLCD1_A: LCD1.A R18.1 | length 4.3
  Top Layer w0.3: R18.1 LCD1.A
NetLCD1_A1: LCD1.A1 R19.1 | length 2.8
  Bottom Layer w0.3: R19.1 LCD1.A1
NetLCD1_A2: LCD1.A2 R20.1 | length 2.7
  Bottom Layer w0.3: R20.1 LCD1.A2
NetLCD1_A3: LCD1.A3 R21.1 | length 2.7
  Bottom Layer w0.3: R21.1 LCD1.A3
NetLCD1_A4: LCD1.A4 R22.1 | length 2.7
  Bottom Layer w0.3: R22.1 LCD1.A4
NetLCD1_A5: LCD1.A5 R23.2 | length 2.7
  Bottom Layer w0.3: R23.2 LCD1.A5
NetLCD1_A6: LCD1.A6 R24.1 | length 2.8
  Bottom Layer w0.3: R24.1 LCD1.A6
NetLCD1_K: LCD1.K LCD1.K1 LCD1.K2 LCD1.K3 LCD1.K4 LCD1.K5 LCD1.K6 Q2.3 | length 54.5
  Top Layer w0.3: Q2.3 LCD1.K
  Bottom Layer w0.3: LCD1.K -26.75,46.45 LCD1.K6 -18.45,46.45 -17.85,45.85 LCD1.K5 LCD1.K4 LCD1.K3 LCD1.K2 19.55,45.85 20.15,46.45 LCD1.K1
NetLED1_1: LED1.1 R3.1 | length 4
  Bottom Layer w0.3: R3.1 -3.995,0.445 LED1.1 LED1.1@0.005,0.45
NetLED8_1: LED8.1 R33.1 R34.2 R35.2 | length 21.2
  Top Layer w0.3: LED8.1 2.655,58.545 4.45,56.75 4.45,54.075 7.4,51.125 R35.2
  Bottom Layer w0.3: LED8.1@0.43,58.975 LED8.1 1.705,58.545 3.05,57.2 R33.1@3.9,57.2 ; R33.1 4.8,58.7 5.825,59.725 R34.2@6.75,59.725
NetLED8_2: LED8.2 Q3.3 | length 3.3
  Top Layer w0.3: Q3.3 LED8.2
NetQ1_1: Q1.1 R4.1 R5.2 | length 14.5
  Bottom Layer w0.3: R4.1 -2,-6.7 -1.05,-5.75 Q1.1 8.55,-3.425 R5.2
NetQ2_1: Q2.1 R16.2 R17.1 | length 4.3
  Top Layer w0.3: Q2.1 -23.05,39.95 R17.1 R16.2
NetQ3_1: Q3.1 R31.2 R32.1 | length 6.2
  Top Layer w0.3: Q3.1 R31.2 2.975,48.475 R32.1
NetQ4_1: Q4.1 R36.2 R38.1 | length 4
  Top Layer w0.3: R36.2 21.75,26.2 Q4.1 R38.1@23.725,24.175
NetR12_1: R12.1 R13.2 U2.3 U3.2 | length 11.6
  Top Layer w0.3: R12.1@-13.05,0.325 R13.2@-11.125,0.325 ; v2(-12.125,-5.85) -12.95,-5.025 -12.95,-2.7 -12.5,-2.25 U2.3 -11.075,-1.575 R13.2
  Bottom Layer w0.25: U3.2 -12.95,-5.125 -12.225,-5.85 v2(-12.125,-5.85)
NetR34_1: R34.1 X9.1 | length 2.9
  Bottom Layer w0.3: X9.1 10.295,59.72 R34.1
NetR35_1: R35.1 X9.3 | length 3.4
  Top Layer w0.3: X9.3 10.295,50.93 R35.1
NetRFM1_8: RFM1.8
SGND: C1.1 C2.1 C3.1 C4.2 C5.1 C6.1 C10.1 C11.1 C12.2 C13.2 C14.1 C15.1 C16.2 C17.1 C18.1 C21.1 C22.1 C23.1 C24.2 C25.2 C26.2 DA1.2 DA2.2 DA3.2 DD1.3 DD1.5 DD1.21 DD2.4 LCD1.5 LED1.2 pad.M3 Q2.2 Q3.2 R5.1 R7.1 R9.1 R11.1 R13.1 R17.2 R32.2 RFM1.1 U2.2 U3.3 X1.1 X2.1 X3.1 X3.2 X5.1 X5.2 X7.3 X7.4 X8.3 X8.4 | length 413.3
  Top Layer w0.3: Q2.2 -23.05,41.85 R17.2 ; v1(-23,52.5) R17.2 ; X8.3 -18.125,2.95 ; X8.4 -20.625,14.3 -13.4,21.525 C6.1 -10.25,21.875 DD1.3 -6.4,21.875 ; C16.2 -22.05,-6.4 -22.775,-5.675 -22.775,1.4 -21.225,2.95 -18.125,2.95 ; v1(-19.675,29.3) -19.675,40.8 -20.675,41.8 R17.2 ; C22.1 -17.625,57.275 DA2.2 ; v1(-12.925,36.05) -2.55,36.05 -1.675,35.175 C18.1 -0.635,32.385 LCD1.5 ; U2.2 -9.725,-3.2 C14.1 -9.35,0.25 R13.1 -9.275,2.075 ; v1(-8.425,-2.75) -7.2,-2.75 -6.45,-3.5 -6.45,-4.925 -5.75,-5.625 R11.1 ; X7.3 -8.375,2.975 -9.275,2.075 ; DD1.5 -6.425,20.275 -5.975,20.725 -5.975,21.45 -6.4,21.875 ; DA3.2 -3.875,57.275 C23.1 ; Q3.2 2.975,50.575 R32.2 ; C5.1 3.275,21.075 DD1.21 -0.7,21.075 -1.5,21.875 -6.4,21.875 ; R9.1 3.825,-11.06 X2.1 5.075,-11.075 6.575,-9.575 6.575,-3.975 v1(5.975,-3.375) ; v1(4,21.575) 4,22.675 13.3,31.975 C24.2 ; C17.1 10.32,17.095 DD2.4 ; DA1.2 17.65,57.275 C21.1 ; v1(19.575,-2.775) 21.575,-4.775 C10.1 21.575,-9.9 R7.1 ; X1.1 29.1,7.775 29.75,8.425 29.75,23.625 v2(29.4,23.975) ; RFM1.1@28.075,36.65 RFM1.1@28.1,36.675 ; C26.2 C25.2 29.15,36.65 RFM1.1@29.175,36.675 ; -18.125,2.95 -10.15,2.95 -9.275,2.075
  Bottom Layer w0.25: -14.85,-9.95 -14.375,-9.95 -12.975,-8.55 -12.975,-6.8 -13.6,-6.175 U3.3
  Bottom Layer w0.3: v1(-23,52.5) -23,53.45 -19.175,57.275 DA2.2 DA3.2 -3.95,57.275 -2.75,56.075 -2.75,53.25 -0.525,51.025 v1(3.8,51.025) 16.675,51.025 18.675,53.025 18.675,56.25 17.65,57.275 DA1.2 ; X8.3 X8.4 -20.625,28.35 v1(-19.675,29.3) v1(-12.925,36.05) ; v1(-19.1,-7.7) -19.1,-9.225 -18.375,-9.95 C13.2@-17.45,-9.95 ; C1.1 C2.1 X7.4 X7.3 ; C15.1 -9.675,0.6 -8.425,-0.65 v1(-8.425,-2.75) -0.655,-2.75 LED1.2 1.28,-3.375 v1(5.975,-3.375) ; C4.2 11.125,23.075 12.075,22.125 12.075,17.65 v1(10.85,16.425) 10.85,12.625 10.175,11.95 X5.1 X5.2 10.625,3.2 19.825,3.2 ; C11.1 17.675,1.05 ; C12.2 18.175,0.55 17.675,1.05 ; X3.1 X3.2 ; X1.1 C3.1 25.075,6.075 24.45,5.45 X3.2 ; RFM1.1@28.1,36.675 28.1,27.675 29.325,26.45 v2@29.325,24.05 ; 17.675,1.05 19.825,3.2 ; 19.825,3.2 20.625,4 X3.2
VCC2V7: C4.1 C5.2 C6.2 C9.2 C11.2 C12.1 C17.2 DD1.4 DD1.6 DD1.18 DD1.20 DD2.3 DD2.7 DD2.8 L1.2 Q4.2 R1.2 R6.2 R14.1 R18.2 R19.2 R20.2 R21.2 R22.2 R23.1 R24.2 R33.2 R38.2 X1.3 X9.2 X9.4 X10.1 | length 214.6
  Top Layer w0.3: v1(-24.55,28.8) R18.2 ; C6.2 -10.25,19.475 -8.625,19.475 ; DD1.4 -8.7,21.075 -9.025,20.75 -9.025,19.875 -8.625,19.475 ; DD1.18 1.975,18.675 2.4,19.1 ; X9.2 7.755,58.855 8.575,59.675 12.375,59.675 13.475,58.575 13.475,48.275 8.95,43.75 v1(8.95,39.45) ; C9.2 9.675,-1.325 R6.2 11.725,-1.375 L1.2 ; R14.1 19.475,21.925 ; v2(20.575,23.85) 20.575,23.025 19.925,22.375 ; R38.2 25.575,22.975 24.975,22.375 19.925,22.375 ; R38.2@25.625,24.175 Q4.2 26.725,26.2 X10.1 ; X1.3 26.37,12.855 23.075,16.15 23.075,17.925 21.365,19.635 DD2.7 ; -8.625,19.475 DD1.6 -5.15,19.475 -3.525,21.1 -2.125,21.1 -1.3,20.275 DD1.20 1.975,20.275 2.4,19.85 2.4,19.1 ; 2.4,19.1 6.35,19.1 6.875,18.575 C17.2 10.31,18.365 DD2.3 15.915,18.365 17.185,19.635 DD2.7 ; DD2.7 DD2.8 19.475,21.925 ; 19.475,21.925 19.925,22.375
  Bottom Layer w0.3: v1(-24.55,28.8) -23.15,30.2 -23.15,37.775 -24.2,38.825 R24.2 -21.15,40.05 -20.55,39.45 R23.1 R22.2 R21.2 v1(8.95,39.45) R20.2 14.85,39.45 15.45,40.05 R19.2 18.675,25.75 v2(20.575,23.85) ; R33.2 4.81,54.31 X9.4 X9.2 ; C4.1 6.15,15.8 6.15,2.75 7.85,1.05 12.875,1.05 ; 11.95,-1.25 11.95,0.125 12.875,1.05 ; C11.2 12.875,1.05 ; R1.2 25.13,12.855 X1.3
  other v1: 11.975,-4.275 4,18.175
VCC3V3: C7.1 C8.2 C15.2 C16.1 Q1.2 R12.2 U1.1 U1.3 U2.4 U3.4 | length 78.1
  Top Layer w0.3: C16.1 -19.45,0.325 v2(-16.75,0.325) R12.2 -14.925,-1.475 U2.4 ; v1(10.525,-9.975) 9.95,-9.4 9.95,-7.325 10.6,-6.675 13.55,-6.675 13.8,-6.925 U1.1 ; C8.2 11.875,-9.5 U1.3
  Bottom Layer w0.25: C15.2 -13.6,0.4 U3.4
  Bottom Layer w0.3: C15.2 -14.075,0.325 v2(-16.75,0.325) -17.6,0.325 -20.775,-2.85 -20.775,-10.825 -18.6,-13 10.5,-13 11.8,-11.7 C7.1 10.9,-7.65 Q1.2

## Polygon pours and split planes (outlines as drawn)
SGND on Top Layer "Top Layer-SGND" (solid, remove dead copper, pour order 2): -31.5,61.9 31.5,61.9 31.5,48.125 12,48.125 12,34.625 31.5,34.625 31.5,-15 -31.5,-15
SGND on Bottom Layer "Bottom Layer-SGND" (solid, remove dead copper, pour order 3): -31.5,61.9 31.5,61.9 31.5,48.125 12,48.125 12,34.625 31.5,34.625 31.5,-15 -31.5,-15

## Silkscreen, mask and mechanical layers (free items; w line width, h text height)
Top Overlay:
  text "attom" at -20.875,15.55 h2.5 r90
  text "MCounter" at -26.275,6.1 h3 r90
  text "BAT-2" at -5.875,-13.4 h1 r90
  text "BAT-1" at 6.875,-13.4 h1 r90
  text "+" at -4.325,-14.275 h1.52
  text "-" at -1.775,-14.275 h1.52
  text "+" at 0.775,-14.275 h1.52
  text "-" at 3.3,-14.275 h1.52
Mechanical 5:
  the board outline again, w1.2

## Text inside footprints (layer, text, board x,y; h text height)
X9: Top Overlay "1" at 11.965,58.59 h1.5; Top Overlay "2" at 11.965,56.11 h1.5; Top Overlay "3" at 11.965,53.67 h1.5; Top Overlay "MIN" at 7.165,58.61 h1.5